# EAGLE board dhdjkadqw (EAGLE 9.6.2)
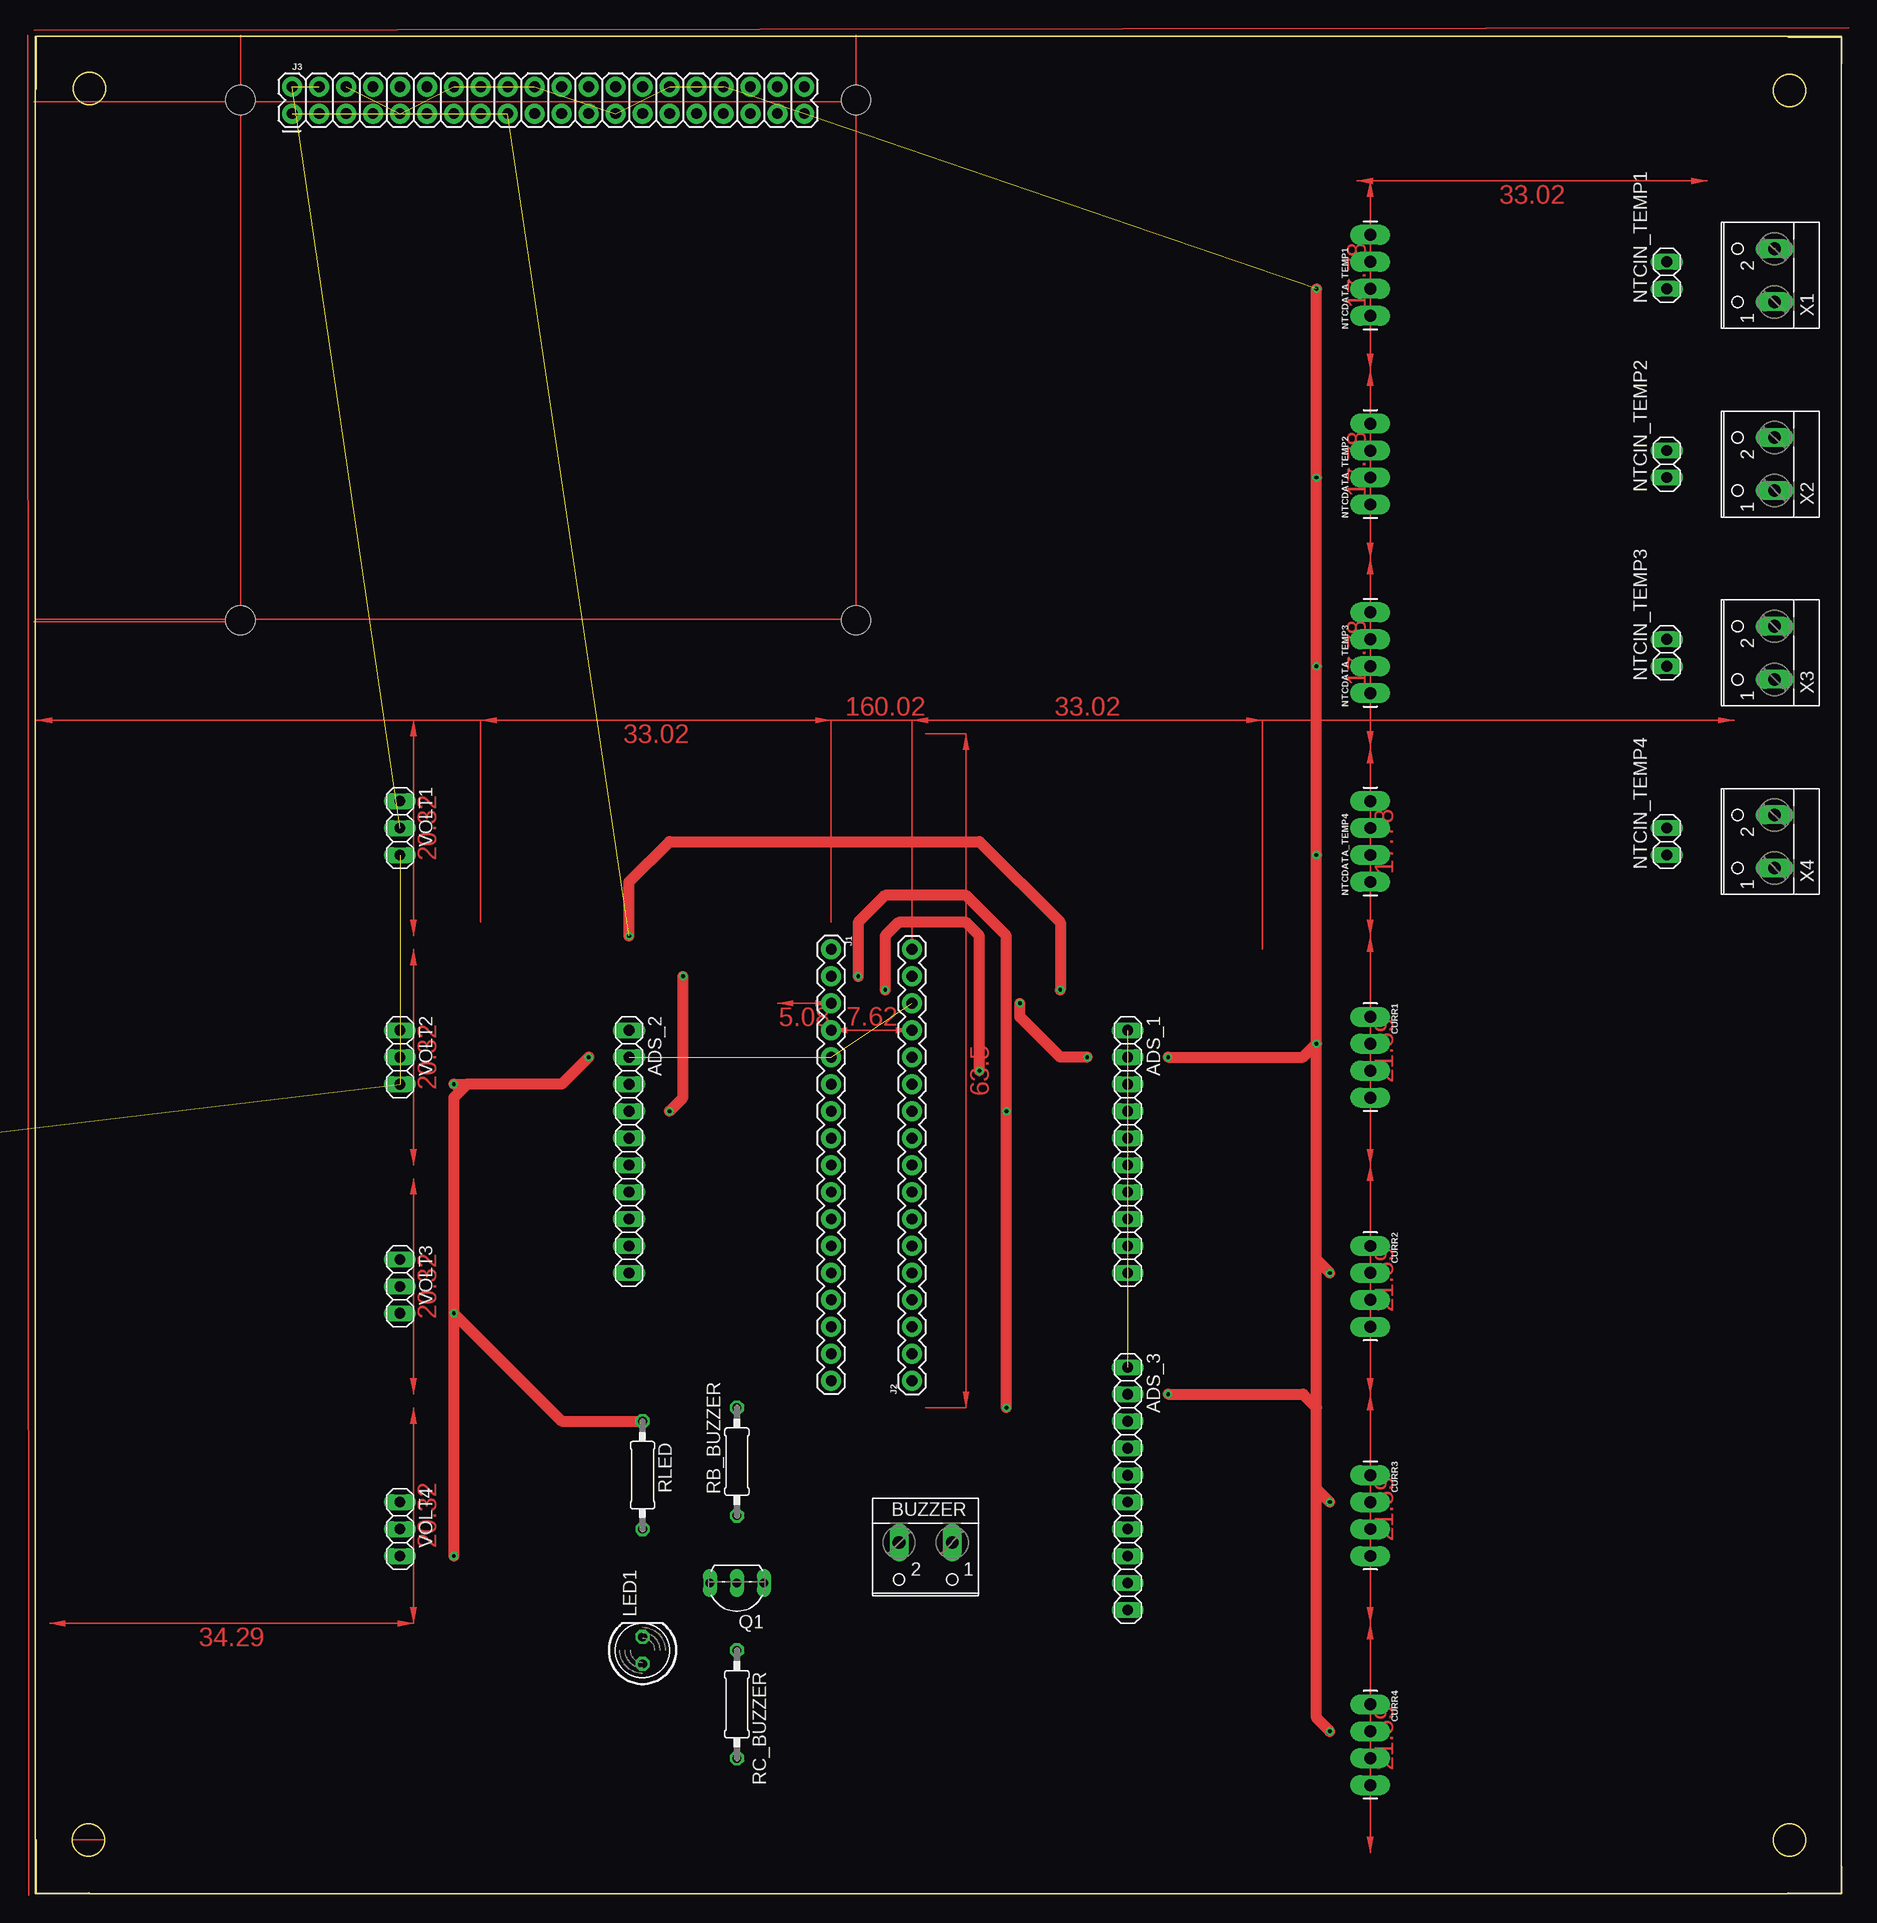
[diagram p0: board, top side]
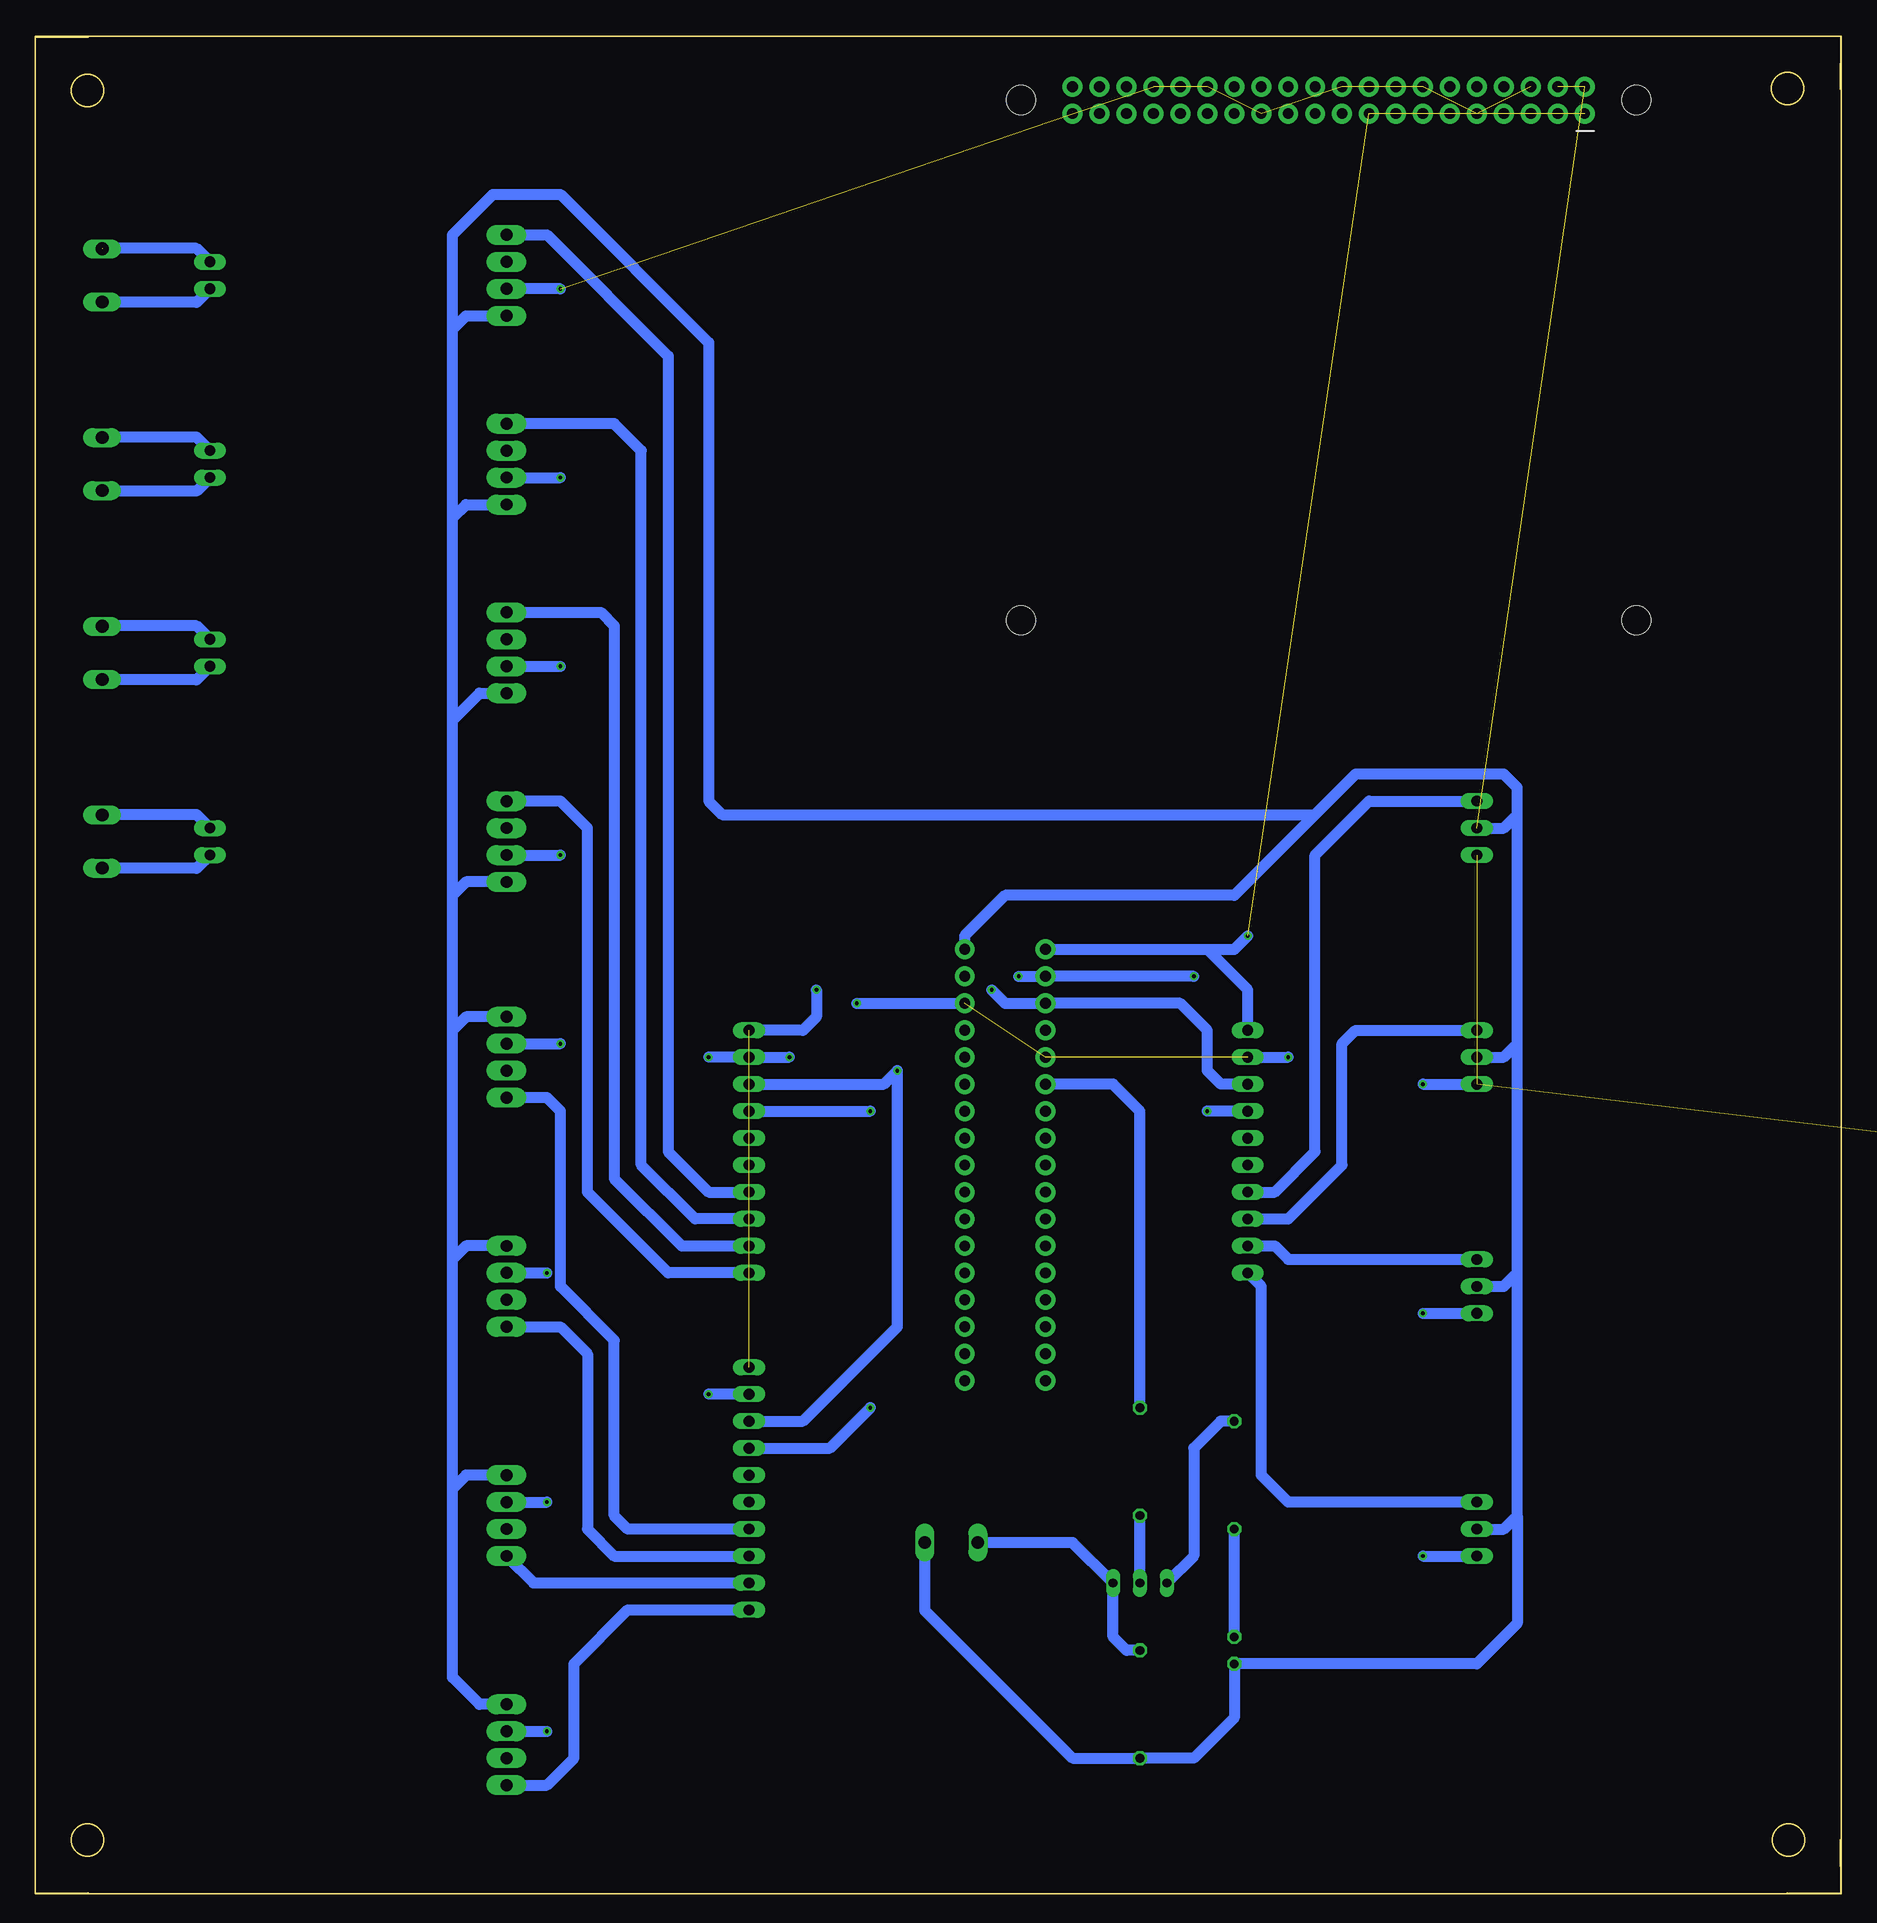
[diagram p1: board, bottom side, seen from below]

Size 170.23 x 175.02 mm. Coordinates in mm from the lower left corner, seen from the top.
Outline: 170.23,0.09 170.23,175.02 0.07,175.02
Outline: 0,175 0,0 170.2,0 170.2,175 0,175
Outline: circle at 5.1,170.1 radius 1.5
Outline: circle at 165.3,169.9 radius 1.5
Outline: circle at 165.3,5.1 radius 1.5
Outline: circle at 5,5.1 radius 1.5
Outline: circle at 5,5.1 radius 1.5
Copper layers (1*16): Top 0.035mm / dielectric 1.5mm / Bottom 0.035mm
Design rules "default": minimum track width 6mil, minimum drill 0.35mm, track to track 6mil, track to pad 6mil, pad to pad 6mil, via to via 6mil, smd to smd 6mil, copper to edge 40mil, drill to drill 6mil, minimum pad ring 10mil, minimum via ring 8mil, stop-mask expansion 4mil, vias tented up to drill 0mil, thermal gap 10mil

## Footprints (pad centres in the part's own frame; a part is rotated, then mirrored left to right if it is on the bottom)
1X10 = drill 1.016 long: 1 -11.43,0; 2 -8.89,0; 3 -6.35,0; 4 -3.81,0; 5 -1.27,0; 6 1.27,0; 7 3.81,0; 8 6.35,0; 9 8.89,0; 10 11.43,0
W237-102 = drill 1.194 long: 1 -2.5,-1.27; 2 2.5,-1.27
1X04_LONGPADS = drill 1.118 pad 1.88 long: 1 0,0; 2 2.54,0; 3 5.08,0; 4 7.62,0
1X17 = drill 1.016 pad 1.88: 1 0,0; 2 2.54,0; 3 5.08,0; 4 7.62,0; 5 10.16,0; 6 12.7,0; 7 15.24,0; 8 17.78,0; 9 20.32,0; 10 22.86,0; 11 25.4,0; 12 27.94,0; 13 30.48,0; 14 33.02,0; 15 35.56,0; 16 38.1,0; 17 40.64,0
RASPBERRY_PI_HAT_40_PIN_PTH_WITH_REFERNCE = drill 1.016 pad 1.88: 1 0,0; 2 0,2.54; 3 2.54,0; 4 2.54,2.54; 5 5.08,0; 6 5.08,2.54; 7 7.62,0; 8 7.62,2.54; 9 10.16,0; 10 10.16,2.54; 11 12.7,0; 12 12.7,2.54; 13 15.24,0; 14 15.24,2.54; 15 17.78,0; 16 17.78,2.54; 17 20.32,0; 18 20.32,2.54; 19 22.86,0; 20 22.86,2.54; 21 25.4,0; 22 25.4,2.54; 23 27.94,0; 24 27.94,2.54; 25 30.48,0; 26 30.48,2.54; 27 33.02,0; 28 33.02,2.54; 29 35.56,0; 30 35.56,2.54; 31 38.1,0; 32 38.1,2.54; 33 40.64,0; 34 40.64,2.54; 35 43.18,0; 36 43.18,2.54; 37 45.72,0; 38 45.72,2.54; 39 48.26,0; 40 48.26,2.54 | hole 2.75: -4.87,-47.727; 53.13,-47.727; 53.13,1.273; -4.87,1.273
LED5MM = drill 0.813 octagon: A -1.27,0; K 1.27,0
1X02 = drill 1.016 long: 1 -1.27,0; 2 1.27,0
TO92-EBC = drill 0.813 long: B 0,-1.27; C -2.54,-1.27; E 2.54,-1.27
0207/10 = drill 0.813 octagon: 1 -5.08,0; 2 5.08,0
ADC-4CH-ADS1115 = drill 1 square: 1 -6.35,11.43 | drill 1: 2 -6.35,8.89; 3 -6.35,6.35; 4 -6.35,3.81; 5 -6.35,1.27; 6 -6.35,-1.27; 7 -6.35,-3.81; 8 -6.35,-6.35; 9 -6.35,-8.89; 10 -6.35,-11.43 | hole 3.1: 6.604,11.43; 6.604,-11.43
1X03 = drill 1.016 long: 1 -2.54,0; 2 0,0; 3 2.54,0

## Placement (x,y rotation side)
ADS_1  [1X10]  102.94,69.94 270 top
ADS_2  [1X10]  55.95,69.94 270 top
ADS_3  [1X10]  102.94,38.19 270 top
BUZZER  [W237-102]  83.89,31.84 180 top
CURR1  [1X04_LONGPADS]  125.8,82.64 270 top
CURR2  [1X04_LONGPADS]  125.8,61.05 270 top
CURR3  [1X04_LONGPADS]  125.8,39.46 270 top
CURR4  [1X04_LONGPADS]  125.8,17.87 270 top
J1  [1X17]  75,88.99 270 top
J2  [1X17]  82.62,48.35 90 top
J3  RASPBERRYPI-40-PIN-GPIO_PTH_REFERENCE  [RASPBERRY_PI_HAT_40_PIN_PTH_WITH_REFERNCE]  24.2,167.73 0 top
LED1  [LED5MM]  57.22,22.95 90 top
NTCDATA_TEMP1  [1X04_LONGPADS]  125.8,148.68 90 top
NTCDATA_TEMP2  [1X04_LONGPADS]  125.8,130.9 90 top
NTCDATA_TEMP3  [1X04_LONGPADS]  125.8,113.12 90 top
NTCDATA_TEMP4  [1X04_LONGPADS]  125.8,95.34 90 top
NTCIN_TEMP1  [1X02]  153.74,152.49 90 top
NTCIN_TEMP2  [1X02]  153.74,134.71 90 top
NTCIN_TEMP3  [1X02]  153.74,116.93 90 top
NTCIN_TEMP4  [1X02]  153.74,99.15 90 top
Q1  BC548  [TO92-EBC]  66.11,28.03 180 top
RB_BUZZER  1k  [0207/10]  66.11,40.73 90 top
RC_BUZZER  10k  [0207/10]  66.11,17.87 270 top
RLED  220R  [0207/10]  57.22,39.46 270 top
U$1  ADC-4CH-ADS1115  [ADC-4CH-ADS1115]  -25.33,78.83 180 top  (outside the outline)
VOLT1  [1X03]  34.36,100.42 270 top
VOLT2  [1X03]  34.36,78.83 270 top
VOLT3  [1X03]  34.36,57.24 270 top
VOLT4  [1X03]  34.36,34.38 270 top
X1  [W237-102]  162.63,152.49 90 top
X2  [W237-102]  162.63,134.71 90 top
X3  [W237-102]  162.63,116.93 90 top
X4  [W237-102]  162.63,99.15 90 top

## Library data of the parts
ADS_1-ADS_3 NTCIN_TEMP1-NTCIN_TEMP4 VOLT1-VOLT4 = pinhead
BUZZER X1-X4 = con-wago-500; MPN: 237-102; OC_FARNELL: unknown; OC_NEWARK: 70K9898
CURR1-CURR4 NTCDATA_TEMP1-NTCDATA_TEMP4 = SparkFun-Connectors; PROD_ID: CONN-09696
J1-J3 = SparkFun-Connectors
LED1 = led
Q1 = transistor-npn
RB_BUZZER RC_BUZZER RLED = rcl; SPICEPREFIX: R
U$1 = diy-modules

## Nets
3.3V: ADS_1.1 ADS_2.1 ADS_3.1 J1.1 J3.1 J3.17
5V: BUZZER.1 CURR1.1 CURR2.1 CURR3.1 CURR4.1 J2.17 J3.2 J3.4 LED1.A NTCDATA_TEMP1.1 NTCDATA_TEMP2.1 NTCDATA_TEMP3.1 NTCDATA_TEMP4.1 RC_BUZZER.2 VOLT1.2 VOLT2.2 VOLT3.2 VOLT4.2
ADS1_A0: ADS_1.7 NTCDATA_TEMP1.4
ADS1_A1: ADS_1.8 NTCDATA_TEMP2.4
ADS1_A2: ADS_1.9 NTCDATA_TEMP3.4
ADS1_A3: ADS_1.10 NTCDATA_TEMP4.4
ADS2_A0: ADS_2.7 VOLT1.1
ADS2_A1: ADS_2.8 VOLT2.1
ADS2_A2: ADS_2.9 VOLT3.1
ADS2_A3: ADS_2.10 VOLT4.1
ADS3_A0: ADS_3.7 CURR1.4
ADS3_A1: ADS_3.8 CURR2.4
ADS3_A2: ADS_3.9 CURR3.4
ADS3_A3: ADS_3.10 CURR4.4
GND: ADS_1.2 ADS_2.2 ADS_3.2 CURR1.2 CURR2.2 CURR3.2 CURR4.2 J1.5 J2.15 J3.6 J3.9 J3.14 J3.20 J3.25 J3.30 J3.34 J3.39 NTCDATA_TEMP1.2 NTCDATA_TEMP2.2 NTCDATA_TEMP3.2 NTCDATA_TEMP4.2 Q1.E RLED.1 U$1.2 VOLT1.3 VOLT2.3 VOLT3.3 VOLT4.3
GPIO17: J1.6 RB_BUZZER.2
N$1: BUZZER.2 Q1.C RC_BUZZER.1
N$2: LED1.K RLED.2
N$3: NTCIN_TEMP1.2 X1.2
N$4: Q1.B RB_BUZZER.1
N$5: NTCIN_TEMP1.1 X1.1
N$15: NTCIN_TEMP4.1 X4.1
N$16: NTCIN_TEMP4.2 X4.2
N$17: NTCIN_TEMP3.1 X3.1
N$18: NTCIN_TEMP3.2 X3.2
N$19: NTCIN_TEMP2.1 X2.1
N$20: NTCIN_TEMP2.2 X2.2
SCL: ADS_1.3 ADS_2.3 ADS_3.3 J1.3
SDA: ADS_1.4 ADS_2.4 ADS_3.4 J1.2
VDD: U$1.1

## Tracks (layer width: path | path; a pad name or v marks a point on that pad's centre or on a via)
3.3V  (via drill 0.35)  (3 unrouted)
  Top 1.016: v55.95,90.26 55.95,95.34 59.76,99.15 88.97,99.15 96.59,91.53 v96.59,85.18
  Bottom 1.016: ADS_2.1 55.95,85.18 59.76,88.99 | J1.1 59.76,88.99 | 59.76,88.99 57.22,88.99 v55.95,90.26 | v96.59,85.18 96.59,82.64 97.86,81.37 ADS_1.1
5V  (2 unrouted)
  Bottom 1.016: VOLT1.2 31.82,100.42 30.55,101.69 | 30.55,101.69 30.55,104.23 31.82,105.5 45.79,105.5 49.6,101.69 | J2.17 82.62,90.26 78.81,94.07 57.22,94.07 49.6,101.69 | VOLT2.2 31.82,78.83 30.55,80.1 | 30.55,80.1 30.55,101.69 | VOLT3.2 31.82,57.24 30.55,58.51 | 30.55,58.51 30.55,80.1 | VOLT4.2 31.82,34.38 30.55,35.65 | 30.55,35.65 30.55,58.51 | 30.55,35.65 30.55,25.49 34.36,21.68 LED1.A 57.22,16.6 61.03,12.79 RC_BUZZER.2 72.46,12.79 86.39,26.72 BUZZER.1 | CURR4.1 128.34,17.87 130.88,20.41 130.88,38.19 | 130.88,38.19 130.88,59.78 | 130.88,59.78 130.88,81.37 | 130.88,81.37 130.88,94.07 | 130.88,94.07 130.88,110.58 | 130.88,110.58 130.88,129.63 | 130.88,129.63 130.88,147.41 | 130.88,147.41 129.61,148.68 NTCDATA_TEMP1.1 | 130.88,147.41 130.88,156.3 127.07,160.11 120.72,160.11 106.75,146.14 106.75,102.96 105.48,101.69 49.6,101.69 | 130.88,129.63 129.61,130.9 NTCDATA_TEMP2.1 | 130.88,110.58 128.34,113.12 NTCDATA_TEMP3.1 | NTCDATA_TEMP4.1 129.61,95.34 130.88,94.07 | CURR1.1 129.61,82.64 130.88,81.37 | CURR2.1 129.61,61.05 130.88,59.78 | CURR3.1 129.61,39.46 130.88,38.19
ADS1_A0
  Bottom 1.016: NTCDATA_TEMP1.4 121.99,156.3 110.56,144.87 110.56,69.94 106.75,66.13 ADS_1.7
ADS1_A1
  Bottom 1.016: NTCDATA_TEMP2.4 115.64,138.52 113.1,135.98 113.1,68.67 108.02,63.59 ADS_1.8
ADS1_A2
  Bottom 1.016: NTCDATA_TEMP3.4 116.91,120.74 115.64,119.47 115.64,67.4 109.29,61.05 ADS_1.9
ADS1_A3
  Bottom 1.016: NTCDATA_TEMP4.4 120.72,102.96 118.18,100.42 118.18,66.13 110.56,58.51 ADS_1.10
ADS2_A0
  Bottom 1.016: ADS_2.7 53.41,66.13 49.6,69.94 49.6,97.88 44.52,102.96 VOLT1.1
ADS2_A1
  Bottom 1.016: ADS_2.8 52.14,63.59 47.06,68.67 47.06,80.1 45.79,81.37 VOLT2.1
ADS2_A2
  Bottom 1.016: ADS_2.9 53.41,61.05 52.14,59.78 VOLT3.1
ADS2_A3
  Bottom 1.016: ADS_2.10 54.68,57.24 54.68,39.46 52.14,36.92 VOLT4.1
ADS3_A0
  Bottom 1.016: ADS_3.7 114.37,34.38 115.64,35.65 115.64,52.16 120.72,57.24 120.72,73.75 121.99,75.02 CURR1.4
ADS3_A1
  Bottom 1.016: ADS_3.8 115.64,31.84 118.18,34.38 118.18,50.89 120.72,53.43 CURR2.4
ADS3_A2
  Bottom 1.016: CURR3.4 123.26,29.3 ADS_3.9
ADS3_A3
  Bottom 1.016: CURR4.4 121.99,10.25 119.45,12.79 119.45,21.68 114.37,26.76 ADS_3.10
GND  (via drill 0.35)  (12 unrouted)
  Top 1.016: v52.14,78.83 49.6,76.29 40.71,76.29 | v39.44,76.29 40.71,76.29 | 40.71,76.29 39.44,75.02 v39.44,54.7 | v39.44,54.7 v39.44,31.84 | v39.44,54.7 49.6,44.54 RLED.1 | v99.13,78.83 96.59,78.83 92.78,82.64 v92.78,83.91 | v106.75,78.83 119.45,78.83 v120.72,80.1 | v120.72,80.1 v120.72,97.88 v120.72,115.66 v120.72,133.44 v120.72,151.22 | v121.99,58.51 120.72,59.78 | 120.72,59.78 v120.72,80.1 | v121.99,36.92 120.72,38.19 | 120.72,38.19 120.72,45.81 | 120.72,45.81 120.72,59.78 | v106.75,47.08 119.45,47.08 120.72,45.81 | v121.99,15.33 120.72,16.6 120.72,38.19
  Bottom 1.016: ADS_2.2 v52.14,78.83 | v39.44,76.29 VOLT2.3 | v39.44,54.7 VOLT3.3 | v39.44,31.84 VOLT4.3 | RLED.1 58.49,44.54 61.03,42 61.03,31.84 Q1.E | v92.78,83.91 J2.15 | v99.13,78.83 ADS_1.2 v106.75,78.83 | CURR1.2 v120.72,80.1 | v120.72,151.22 NTCDATA_TEMP1.2 | NTCDATA_TEMP2.2 v120.72,133.44 | NTCDATA_TEMP3.2 v120.72,115.66 | NTCDATA_TEMP4.2 v120.72,97.88 | CURR2.2 v121.99,58.51 | CURR3.2 v121.99,36.92 | ADS_3.2 v106.75,47.08 | CURR4.2 v121.99,15.33
GPIO17
  Bottom 1.016: RB_BUZZER.2 66.11,73.75 68.65,76.29 J1.6
N$1
  Bottom 1.016: RC_BUZZER.1 67.38,22.95 68.65,24.22 Q1.C 72.46,33.11 BUZZER.2
N$2
  Bottom 1.016: LED1.K RLED.2
N$3  (1 unrouted)
  Bottom 1.016: NTCIN_TEMP1.2 155.01,155.03 163.9,155.03
N$4
  Bottom 1.016: Q1.B RB_BUZZER.1
N$5
  Bottom 1.016: NTCIN_TEMP1.1 155.01,149.95 163.86,149.95 X1.1
N$15
  Bottom 1.016: NTCIN_TEMP4.1 155.01,96.61 163.86,96.61 X4.1
N$16
  Bottom 1.016: NTCIN_TEMP4.2 155.01,101.69 163.86,101.69 X4.2
N$17
  Bottom 1.016: NTCIN_TEMP3.1 155.01,114.39 163.9,114.39 X3.1
N$18
  Bottom 1.016: NTCIN_TEMP3.2 155.01,119.47 163.86,119.47 X3.2
N$19
  Bottom 1.016: NTCIN_TEMP2.1 155.01,132.17 163.86,132.17 X2.1
N$20
  Bottom 1.016: NTCIN_TEMP2.2 155.01,137.25 163.86,137.25 X2.2
SCL  (via drill 0.35)
  Top 1.016: v88.97,77.56 88.97,90.26 87.7,91.53 81.35,91.53 80.08,90.26 v80.08,85.18
  Bottom 1.016: ADS_2.3 58.49,76.29 59.76,77.56 59.76,81.37 62.3,83.91 J1.3 78.81,83.91 v80.08,85.18 | ADS_1.3 90.24,76.29 v88.97,77.56 88.97,53.43 97.86,44.54 ADS_3.3
SDA  (via drill 0.35)
  Top 1.016: v59.76,73.75 61.03,75.02 v61.03,86.45 | v77.54,86.45 77.54,91.53 80.08,94.07 87.7,94.07 91.51,90.26 v91.51,73.75 v91.51,45.81
  Bottom 1.016: ADS_2.4 v59.76,73.75 | v61.03,86.45 J1.2 v77.54,86.45 | ADS_1.4 v91.51,73.75 | ADS_3.4 95.32,42 v91.51,45.81
(copper drawn outside any net)
  shapes: Top area x31